# Altium PCB NodeBodyControl.PcbDoc
Units mil, origin at the board's own origin, x right, y up, seen from the top; angles counter-clockwise.
Board outline 7085 x 4100 mil, 2 copper layers (Top Layer, Bottom Layer); 76 components, 25 nets, 290 pads, 0 vias.
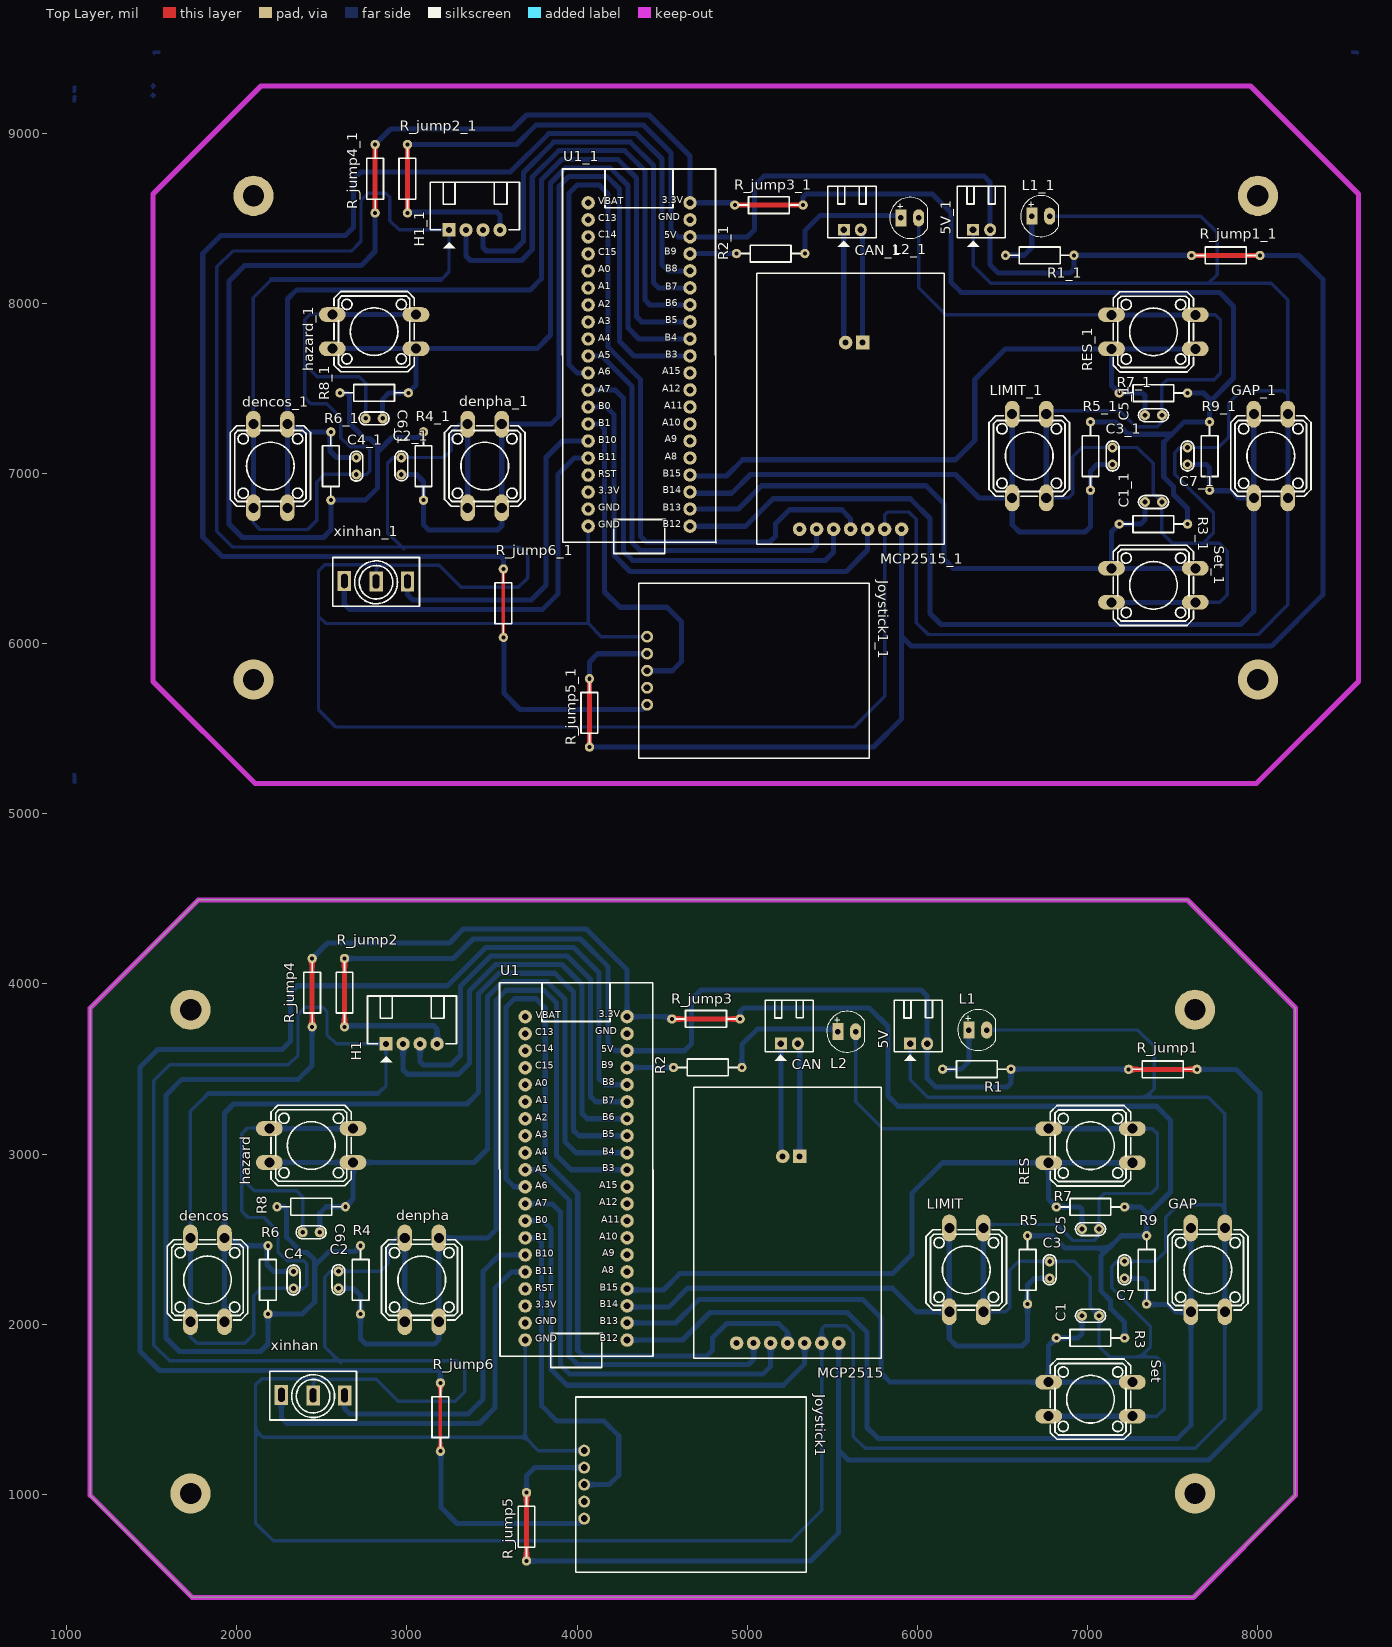
[diagram p0: Top Layer view]
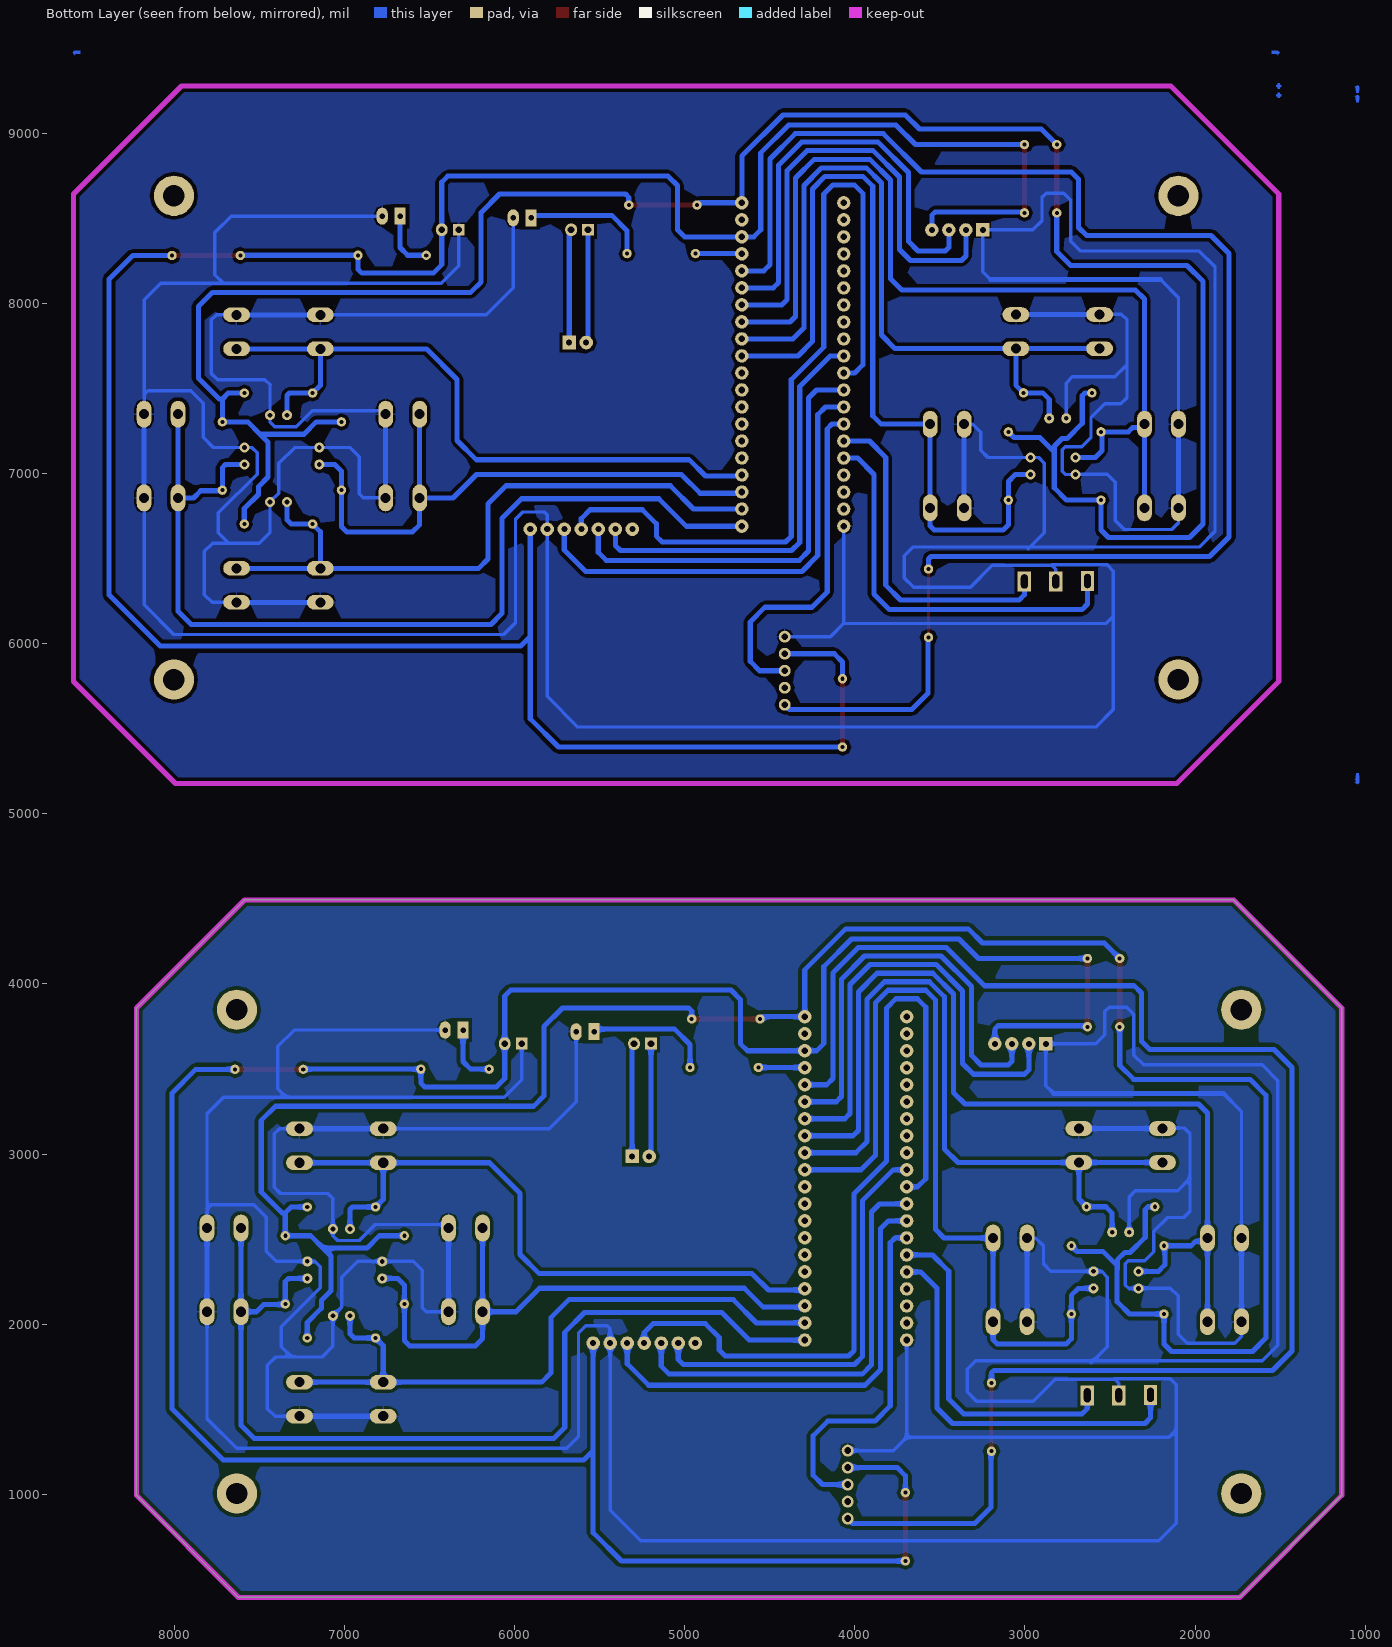
[diagram p1: Bottom Layer view, seen from below]

## Layer stack, top to bottom
Top Solder: solder mask 0.4, Solder Resist, Dk 3.5
Top Layer: signal copper 1.4
Dielectric 1: dielectric 12.6, FR-4, Dk 4.8
Bottom Layer: signal copper 1.4
Bottom Solder: solder mask 0.4, Solder Resist, Dk 3.5

## Board outline
1138,994 1738,394 7623,394 8223,994 8223,3859 7588,4494 1773,4494 1138,3859

## Design rules (kind name [scope] priority, off if disabled: settings)
Clearance [All] p1: gap=20
ComponentClearance Allow_Resistor_Under_Joystick [InComponent('Joystick1') vs InComponent('Designator15')] p1: gap=10 collisioncheckmode=3 verticalgap=100000 showdistances=FALSE
ComponentClearance [All] p2: gap=10 collisioncheckmode=3 verticalgap=10 showdistances=FALSE
Height [All] p1: minheight=0 maxheight=3000 prefheight=500
PolygonConnect [All] p1: connectstyle=Relief reliefconductorwidth=10 reliefentries=4 polygonreliefangle="90 Angle" airgapwidth=10
RoutingVias [All] p1: holewidth=28 width=50 viastyle="Through Hole" minholewidth=28 minwidth=50 maxholewidth=28 maxwidth=50
SolderMaskExpansion [All] p1: expansion=4
Width [All] p1: maxlimit=40 minlimit=20 preferedwidth=30
28 further rules are at their usual default settings.

## Classes and differential pairs
component class NodeBodyControl: 5V C1 C2 C3 C4 C5 C6 C7 CAN dencos denpha GAP H1 hazard Joystick1 L1 L2 LIMIT MCP2515 R1 R2 R3 R4 R5 R6 R7 R8 R9 R_jump1 R_jump2 R_jump3 R_jump4 R_jump5 R_jump6 RES Set U1 xinhan

## Components (designator, comment, footprint, x,y, rotation, side; value= is the part's Value field where it differs from the comment)
5V "Header 2P 2.54 Duc Cong" "Header 2P DC 2.54" 5958,3649 r90 top
5V_1 "Header 2P 2.54 Duc Cong" "Header 2P DC 2.54" 6328,8433 r90 top (schematic designator 5V)
C1 "104" "tu gom" 7017.93,2049 r180 top
C1_1 "104" "tu gom" 7387.93,6833 r180 top (schematic designator C1)
C2 "104" "tu gom" 2597.37,2260.31 r270 top
C2_1 "104" "tu gom" 2967.37,7044.31 r270 top (schematic designator C2)
C3 "104" "tu gom" 6778,2318.93 r270 top
C3_1 "104" "tu gom" 7148,7102.93 r270 top (schematic designator C3)
C4 "104" "tu gom" 2333,2260.17 r90 top
C4_1 "104" "tu gom" 2703,7044.17 r90 top (schematic designator C4)
C5 "104" "tu gom" 7017.93,2559 r180 top
C5_1 "104" "tu gom" 7387.93,7343 r180 top (schematic designator C5)
C6 "104" "tu gom" 2437.37,2540.24 r0 top
C6_1 "104" "tu gom" 2807.37,7324.24 r0 top (schematic designator C6)
C7 "104" "tu gom" 7218,2319 r270 top
C7_1 "104" "tu gom" 7588,7103 r270 top (schematic designator C7)
CAN "" "Header 2P DC 2.54" 5198,3649 r90 top
CAN_1 "" "Header 2P DC 2.54" 5568,8433 r90 top (schematic designator CAN)
dencos "PUSH_BUTTON_12X12" PUSH_BUTTON_12X12_YELLOW 1827.37,2260.24 r270 top
dencos_1 "PUSH_BUTTON_12X12" PUSH_BUTTON_12X12_YELLOW 2197.37,7044.24 r270 top (schematic designator dencos)
denpha "PUSH_BUTTON_12X12" PUSH_BUTTON_12X12_YELLOW 3087.37,2260.24 r270 top
denpha_1 "PUSH_BUTTON_12X12" PUSH_BUTTON_12X12_YELLOW 3457.37,7044.24 r270 top (schematic designator denpha)
GAP "PUSH_BUTTON_12X12" PUSH_BUTTON_12X12_YELLOW 7708,2319 r90 top
GAP_1 "PUSH_BUTTON_12X12" PUSH_BUTTON_12X12_YELLOW 8078,7103 r90 top (schematic designator GAP)
H1 "Header 4P 2.54 Duc Cong" "Header 4P DC 2.54" 2878,3649 r90 top
H1_1 "Header 4P 2.54 Duc Cong" "Header 4P DC 2.54" 3248,8433 r90 top (schematic designator H1)
hazard "PUSH_BUTTON_12X12" PUSH_BUTTON_12X12_RED 2437.37,3050.24 r180 top
hazard_1 "PUSH_BUTTON_12X12" PUSH_BUTTON_12X12_RED 2807.37,7834.24 r180 top (schematic designator hazard)
Joystick1 "Joy" Joystick 3972,857 r0 top
Joystick1_1 "Joy" Joystick 4342,5641 r0 top (schematic designator Joystick1)
L1 "LED 5mm" LED-5MM-Green 6308,3729 r0 top
L1_1 "LED 5mm" LED-5MM-Green 6678,8513 r0 top (schematic designator L1)
L2 "LED 5mm" LED-5MM-Green 5538,3719 r0 top
L2_1 "LED 5mm" LED-5MM-Green 5908,8503 r0 top (schematic designator L2)
LIMIT "PUSH_BUTTON_12X12" PUSH_BUTTON_12X12_YELLOW 6288,2319 r90 top
LIMIT_1 "PUSH_BUTTON_12X12" PUSH_BUTTON_12X12_YELLOW 6658,7103 r90 top (schematic designator LIMIT)
MCP2515 "MCP2515" MCP2515_MODULE 5538,1889 r180 top
MCP2515_1 "MCP2515" MCP2515_MODULE 5908,6673 r180 top (schematic designator MCP2515)
R1 "1k" "tro vach 1/4w" 6350,3499 r180 top
R1_1 "1k" "tro vach 1/4w" 6720,8283 r180 top (schematic designator R1)
R2 "1k" "tro vach 1/4w" 4768,3509 r0 top
R2_1 "1k" "tro vach 1/4w" 5138,8293 r0 top (schematic designator R2)
R3 "10k" "tro vach 1/4w" 7018,1919 r0 top
R3_1 "10k" "tro vach 1/4w" 7388,6703 r0 top (schematic designator R3)
R4 "10k" "tro vach 1/4w" 2727.37,2260.24 r90 top
R4_1 "10k" "tro vach 1/4w" 3097.37,7044.24 r90 top (schematic designator R4)
R5 "10k" "tro vach 1/4w" 6648,2319 r90 top
R5_1 "10k" "tro vach 1/4w" 7018,7103 r90 top (schematic designator R5)
R6 "10k" "tro vach 1/4w" 2183,2260.24 r270 top
R6_1 "10k" "tro vach 1/4w" 2553,7044.24 r270 top (schematic designator R6)
R7 "10k" "tro vach 1/4w" 7018,2689 r0 top
R7_1 "10k" "tro vach 1/4w" 7388,7473 r0 top (schematic designator R7)
R8 "10k" "tro vach 1/4w" 2437.37,2690.24 r180 top
R8_1 "10k" "tro vach 1/4w" 2807.37,7474.24 r180 top (schematic designator R8)
R9 "10k" "tro vach 1/4w" 7348,2319 r90 top
R9_1 "10k" "tro vach 1/4w" 7718,7103 r90 top (schematic designator R9)
R_jump1 "0R" "tro vach 1/4w" 7443,3498 r180 top
R_jump1_1 "0R" "tro vach 1/4w" 7813,8282 r180 top (schematic designator R_jump1)
R_jump2 "0R" "tro vach 1/4w" 2633,3949 r90 top
R_jump2_1 "0R" "tro vach 1/4w" 3003,8733 r90 top (schematic designator R_jump2)
R_jump3 "0R" "tro vach 1/4w" 4758,3794 r180 top
R_jump3_1 "0R" "tro vach 1/4w" 5128,8578 r180 top (schematic designator R_jump3)
R_jump4 "0R" "tro vach 1/4w" 2443,3949 r90 top
R_jump4_1 "0R" "tro vach 1/4w" 2813,8733 r90 top (schematic designator R_jump4)
R_jump5 "0R" "tro vach 1/4w" 3703,809 r90 top
R_jump5_1 "0R" "tro vach 1/4w" 4073,5593 r90 top (schematic designator R_jump5)
R_jump6 "0R" "tro vach 1/4w" 3197,1454 r90 top
R_jump6_1 "0R" "tro vach 1/4w" 3567,6238 r90 top (schematic designator R_jump6)
RES "PUSH_BUTTON_12X12" PUSH_BUTTON_12X12_YELLOW 7018,3049 r180 top
RES_1 "PUSH_BUTTON_12X12" PUSH_BUTTON_12X12_YELLOW 7388,7833 r180 top (schematic designator RES)
Set "PUSH_BUTTON_12X12" PUSH_BUTTON_12X12_YELLOW 7018,1559 r0 top
Set_1 "PUSH_BUTTON_12X12" PUSH_BUTTON_12X12_YELLOW 7388,6343 r0 top (schematic designator Set)
U1 "STM32F103C8T6" "Stm32 BluePill" 3986,3084 r0 top
U1_1 "STM32F103C8T6" "Stm32 BluePill" 4356,7868 r0 top (schematic designator U1)
xinhan "" TOGGLE_SWITCH_SPDT 2448,1583 r0 top
xinhan_1 "" TOGGLE_SWITCH_SPDT 2818,6367 r0 top (schematic designator xinhan)

## Footprints (in the part's own frame and the unit in brackets; to place one, negate y for a bottom-side part, rotate by r counter-clockwise, add the part's x,y. Pads: shape width x height; smd on the part's side, far side on the other; paste and mask are expansions set on the pad)
"Header 2P DC 2.54" [mil]
  rect 70x70 hole 39.37 unplated: 1(0,0)
  oval 75x70 hole 39.37 unplated: 2(0,-100)
  silkscreen extent -100,-190 255,93, body extent -50,-190 250,90, height 237
"Header 4P DC 2.54" [mil]
  rect 78.74x78.74 hole 35: 1(-1,0.71)
  round 78.74 hole 35: 2(-1,-99.29) 3(-1,-199.29) 4(-1,-299.28)
  silkscreen extent -110,-414 280,110, body extent 5,-418 278,118, height 290
Joystick [mil]
  round 70 hole 40: 1(70,400) 2(70,300) 3(70,200) 4(70,100) 5(70,0)
  silkscreen extent 20,-315 1375,715, body extent -198,-333 1369,740, height 1214
LED-5MM-Green [mil] "LED 2 PIN, 5 ly , Only colour,pin to pin 100mil"
  rect 65x100 hole 32: 1(-5,0)
  oval 65x100 hole 32: 2(100,0)
  silkscreen extent -70,-120 154,120, body extent -69,-120 145,117, height 339
MCP2515_MODULE [mil]
  round 80 hole 35.43: 1(600,0) 2(500,0) 3(400,0) 4(300,0) 5(200,0) 6(100,0) 7(0,0) 9(329.13,-1097.28)
  rect 80x80 hole 35.43: 8(229.13,-1097.28)
  silkscreen extent -251,-1504 851,89, body extent -251,-1496 851,79, height 444
PUSH_BUTTON_12X12_RED [mm]
  oval 4x2.2 hole 1.5: 1(-6.251,2.54) 1(6.251,2.54) 2(-6.251,-2.54) 2(6.251,-2.54)
  silkscreen extent -5.99,-6 5.99,6, body extent -6.77,-6.01 6.65,6, height 8.84
PUSH_BUTTON_12X12_YELLOW [mm]
  oval 4x2.2 hole 1.5: 1(-6.251,2.54) 1(6.251,2.54) 2(-6.251,-2.54) 2(6.251,-2.54)
  silkscreen extent -5.99,-6 5.99,6, body extent -6.77,-6.01 6.65,6, height 8.84
"Stm32 BluePill" [mm]
  round 2 hole 1: 1(7.828,-29.909) 2(7.828,-27.343) 3(7.828,-24.803) 4(7.828,-22.263) 5(7.828,-19.723) 6(7.828,-17.183) 7(7.828,-14.643) 8(7.828,-12.103) 9(7.828,-9.563) 10(7.828,-7.023) 11(7.828,-4.483) 12(7.828,-1.943) 13(7.828,0.597) 14(7.828,3.137) 15(7.828,5.677) 16(7.828,8.217) 17(7.828,10.757) 18(7.828,13.297) 19(7.828,15.837) 20(7.828,18.377) 21(-7.386,18.366) 22(-7.386,15.826) 23(-7.386,13.286) 24(-7.386,10.746) 25(-7.386,8.206) 26(-7.386,5.666) 27(-7.386,3.126) 28(-7.386,0.586) 29(-7.386,-1.954) 30(-7.386,-4.494) 31(-7.386,-7.034) 32(-7.386,-9.574) 33(-7.386,-12.114) 34(-7.386,-14.654) 35(-7.386,-17.194) 36(-7.386,-19.734) 37(-7.386,-22.274) 38(-7.386,-24.814) 39(-7.386,-27.354) 40(-7.386,-29.894)
  silkscreen extent -11.22,-34 11.69,23.43, body extent -11.18,-33.27 11.68,24.29, height 12.31
TOGGLE_SWITCH_SPDT [mm]
  rect 2x3 hole 1 slot 2.1 at 90 deg: 1(-4.715,0.031) 2(0.016,-0.031) 3(4.715,-0.031)
  silkscreen extent -6.46,-3.71 6.49,3.56, body extent -6.49,-6.02 6.52,5.96, height 30.32
"tro vach 1/4w" [mm]
  round 1.4 hole 0.6: 1(-5.1,0) 2(5.1,0)
  silkscreen extent -4.39,-1.25 4.42,1.25, body extent -5.38,-1.2 5.38,1.2, height 2.41
"tu gom" [mm] "Tu gom mini"
  round 1.5 hole 0.7: 1(-1.27,0) 2(1.27,0)
  silkscreen extent -2.25,-0.97 2.22,0.97, body extent -2.92,-0.85 2.92,0.85, height 6.12

## Part data
5V 5V_1 H1 H1_1: "Cắm"
C1 C1_1 C2 C2_1 C3 C3_1 C4 C4_1 C5 C5_1 C6 C6_1 C7 C7_1: library part "Tu gom 104 50V", "Cắm"
CAN CAN_1: library part "Header 2P 2.54 Duc Cong", "Cắm"
dencos dencos_1 denpha denpha_1 GAP GAP_1 hazard hazard_1 LIMIT LIMIT_1 RES RES_1 Set Set_1: "Push Button Tactile Switch PTH 4 Pins 12x12mm."
L1 L1_1 L2 L2_1: library part "LED 5mm Xanh La", "Cắm"
R1 R1_1 R2 R2_1: library part "Tro Vach 1/4W 5% 1k", "Cắm"
R3 R3_1 R4 R4_1 R5 R5_1 R6 R6_1 R7 R7_1 R8 R8_1 R9 R9_1: library part "Tro Vach 1/4W 5% 10k", "Căm"
R_jump1 R_jump1_1 R_jump2 R_jump2_1 R_jump3 R_jump3_1 R_jump4 R_jump4_1 R_jump5 R_jump5_1 R_jump6 R_jump6_1: library part "Tro Vach 1/4W 5% 0.11R", "Cắm"
U1 U1_1: library part BluePill, "Designed By @Alixahedi"
xinhan xinhan_1: library part TOGGLE_SWITCH_SPDT, "Toggle Switch SPDT, 125V AC, 6A, 33x13x7mm."

## Free pads (board coordinates)
  round 236.22 hole 125.98: 2(1728.39,1004.67) 2(1728.39,3848.45) 2(2098.39,5788.67) 2(2098.39,8632.45) 2(7632.29,1004.67) 2(7632.29,3848.45) 2(8002.29,5788.67) 2(8002.29,8632.45)

## Nets (pads, with @x,y where several pads share a name; then routed paths per layer and width w, separated by ;. In a path a pad name is that pad's centre, name@x,y a point inside that pad or via, vN(x,y) a via of type N, cw(c..) or ccw(c..) an arc to the next point about the centre after c; other vN are vias at no path point)
3V3: R3.2 R4.2 R5.2 R6.2 R7.2 R8.2 R9.2 R_jump3.1 R_jump3.2 R_jump4.1 R_jump4.2 U1.20 | length 13472.5
  Top Layer w30: R_jump4.1 R_jump4.2 ; R_jump3.2 R_jump3.1
  Bottom Layer w20: 2458,2343 2458,2351 ; 2528,4234.79 2534.21,4241
  Bottom Layer w30: R6.2 2183,1884 2139,1840 1663,1840 1584,1919 1584,3346 1677,3439 2361,3439 2443,3521 R_jump4.1 ; R6.2@2187.37,2059.45 2385.45,2059.45 2458,2132 2458,2343 2543,2428 2694.34,2428 R4.2 ; R8.2 2276.76,2690.24 2293,2674 2293,2511 2382,2422 2413,2422 2457,2378 2457,2323 ; R_jump4.2 2528,4234.79 ; 2534.21,4241 3250,4241 3333,4324 4053,4324 4294.2,4082.8 U1.20 4543.71,3807.5 R_jump3.2 ; R_jump3.1 4958.79,3839.79 4978,3859 5718,3859 5828,3749 5828,3341 5888,3281 7406,3281 7489,3198 7489,2777 7366.5,2654.5 7347.5,2654.5 7313,2689 R7.2 ; R5.2 6795.21,2519.79 6868,2447 7126,2447 ; R3.2 7218.79,2010.21 7136,2093 7136,2139 7079,2196 7079,2400 7126,2447 ; 7348,2654 R9.2 7198.79,2519.79 7126,2447
5V: 5V.2 H1.4 Joystick1.2 MCP2515.7 R1.1 R_jump1.1 R_jump1.2 R_jump2.1 R_jump2.2 R_jump5.1 R_jump5.2 U1.18 | length 16346.5
  Top Layer w30: R_jump2.1 R_jump2.2 ; R_jump5.1 R_jump5.2 ; R_jump1.2 R_jump1.1
  Bottom Layer w30: R_jump2.1 2638.79,3754 3158,3754 3177.28,3734.72 H1.4 ; R_jump2.2 3273.79,4149.79 3388,4264 4020,4264 4183,4101 4183,3649 4224.5,3607.5 U1.18 4631.5,3607.5 4673,3649 4673,3909 4728,3964 6023,3964 6058,3929 5V.2 6058,3444 6108,3394 6528,3394 6550.79,3416.79 R1.1 7241.21,3499 R_jump1.2 ; R_jump5.2@3695.2,1017.59 R_jump5.2 3703,1109 3751,1157 Joystick1.2 ; R_jump5.1 5372.21,608.21 5538,774 5538,1258 ; MCP2515.7 5538,1258 ; R_jump1.1 7874,3498 8014,3358 8014,1503 7713,1202 5594,1202 5538,1258
CRUISE_CONTROL: Joystick1.5 R_jump6.1 R_jump6.2 U1.16 | length 9189.2
  Top Layer w20: R_jump6.1 R_jump6.2
  Bottom Layer w30: R_jump6.2 3197,1714 3183,1728 1545,1728 1430,1843 1430,3509 1536,3615 2267,3615 2315,3663 2315,3946 2358,3989 3238,3989 3463,4214 3980,4214 4129,4065 4129,3444 4165.5,3407.5 U1.16 ; R_jump6.1@3200,1253.21 3200,924 3295,829 4014,829 Joystick1.5
CS_CAN: MCP2515.5 U1.33 | length 2702.2
  Bottom Layer w30: U1.33 3802.93,2607.07 3848,2562 3848,1734 3941,1641 5212,1641 5338,1767 MCP2515.5
DENCOS: C4.2 dencos.1 R6.1 U1.13 | length 5706.4
  Bottom Layer w20: dencos.1@1927.37,2506.34 dencos.1@1946.71,2487
  Bottom Layer w30: dencos.1@1927.37,2014.14 1927.37,2506.34 1927.37,3241.37 1980,3294 3353,3294 3420,3361 3420,3941.13 3541.87,4063 3869,4063 3979,3953 3979,3139 4010.5,3107.5 U1.13 ; dencos.1@1946.71,2487 1997,2487 2022.97,2461.03 R6.1 2178,2456.03 2178,2349 2216.83,2310.17 C4.2
DENPHA: C2.2 denpha.1 R4.1 U1.11 | length 4944.8
  Bottom Layer w30: C2.2 2686.69,2210.31 2727.37,2169.63 R4.1 2727.37,1914.63 2758,1884 3163,1884 3187.37,1908.37 3187.37,2014.14 3187.37,2506.34 3475.34,2506.34 3525,2556 3525,3904.71 3583.29,3963 3804.71,3963 3879,3888.71 3879,2993 3964.5,2907.5 U1.11
ECHO: H1.2 U1.14 | length 2817
  Bottom Layer w30: H1.2 2977.29,3494.71 3003,3469 3303,3469 3367,3533 3367,3958.84 3522.16,4114 3911,4114 4029,3996 4029,3238 4059.5,3207.5 U1.14
GAP: C7.2 GAP.1 R9.1 U1.1 | length 5753.7
  Bottom Layer w30: U1.1 4620.5,1906.5 4782,2068 5589,2068 5705,1952 5705,1393 5769,1329 7531,1329 7608,1406 GAP.1@7608,2072.9 ; C7.2 7329,2269 7348,2250 R9.1 7351.21,2115 7475,2115 7517.1,2072.9 GAP.1@7608,2072.9 ; GAP.1@7608,2565.1 GAP.1@7608,2072.9
GND: 5V.1 C1.1 C2.1 C3.1 C4.1 C5.1 C6.1 C7.1 dencos.2 denpha.2 GAP.2 H1.1 hazard.2 Joystick1.1 L1.2 L2.2 LIMIT.2 MCP2515.6 RES.2 Set.2 U1.40 xinhan.2 | length 39707.5
  Bottom Layer w20: dencos.2@1727.37,2014.14 1727.37,1925.63 1766,1887 2046,1887 2099,1940 2099,2166 2145,2212 2331.17,2212 C4.1 2391.17,2210.17 2411,2230 2411,2355 2393,2373 2296,2373 2242,2427 2242,2545 2160,2627 2066,2627 2030,2663 2030,2857 ; dencos.2@1727.37,2506.34 1727.37,3250.37 1833,3356 ; hazard.2@2191.27,3150.24 2188.51,3153 2063,3153 2030,3120 2030,2857 ; C6.1 2387.37,2747.63 2351,2784 2103,2784 2030,2857 ; xinhan.2 2448.63,1653.63 2474,1679 2146,1679 2110,1643 2110,1378 ; 2471,1676 2821,1676 2950,1547 3285,1547 3340,1602 3340,1734 3290,1784 1606,1784 1513,1877 1513,3432 1605,3524 2302,3524 2360,3582 2360,3822 2402,3864 2505,3864 2530,3839 2530,3702 2584,3648 H1.1 2877.29,3402.29 2831,3356 ; 2611,1773 2516,1868 2516,2277 2549.31,2310.31 C2.1 2847.31,2310.31 2891,2354 2891,2460 2937.34,2506.34 denpha.2@2987.37,2506.34 ; U1.40 3695.2,1334.8 ; Joystick1.1 3773,1257 3695.2,1334.8 ; L2.2 5638,3307 5796,3149 RES.2@6771.9,3149 ; 5V.1 5958,3438 6062,3334 7341,3334 ; LIMIT.2@6388,2072.9 6519.9,2072.9 6543,2096 6543,2316 6595.93,2368.93 C3.1 6923.07,2368.93 7016,2276 7016,2100.93 C1.1 7067.93,1869.07 7130,1807 7311,1807 ; LIMIT.2@6388,2565.1 6408.9,2586 6819,2586 6913,2492 7040,2492 7067.93,2519.93 C5.1 7067.93,2736.07 7067,2737 7098,2768 7376,2768 7412,2804 7412,3119 7382,3149 RES.2@7264.1,3149 ; L1.2 7296,3729 7392,3633 7392,3385 7341,3334 ; Set.2@7264.1,1459 7408,1459 7453,1504 7453,1758 7404,1807 7311,1807 ; GAP.2@7808,2072.9 7808,1444 7634,1270 5694,1270 5624.5,1339.5 5624.5,1946.5 5581,1990 5456,1990 5439,1973 5439,1890 MCP2515.6 5438,906 5258,726 2213,726 2110,829 2110,1378 ; GAP.2@7808,2565.1 7808,2679 ; 2110,1378 2153.2,1334.8 3695.2,1334.8 ; 7311,1807 7371,1867 7371,1985 7143,2213 7143,2338 7174,2369 C7.1 7400,2369 7460,2429 7460,2628 7534,2702 7785,2702 7808,2679 ; 7341,3334 7711,3334 7808,3237 7808,2679
  Bottom Layer w30: dencos.2@1727.37,2014.14 dencos.2@1727.37,2506.34 ; 1833,3356 2831,3356 ; hazard.2@2191.27,3150.24 hazard.2@2683.47,3150.24 ; denpha.2@2987.37,2014.14 denpha.2@2987.37,2506.34 ; LIMIT.2@6388,2072.9 LIMIT.2@6388,2565.1 ; Set.2@6771.9,1459 Set.2@7264.1,1459 ; RES.2@6771.9,3149 RES.2@7264.1,3149 ; GAP.2@7808,2072.9 GAP.2@7808,2565.1
H: CAN.1 MCP2515.9 | length 667.2
  Bottom Layer w30: CAN.1 5198,2997.15 MCP2515.9
HAZARD: C6.2 hazard.1 R8.1 U1.12 | length 4530.9
  Bottom Layer w30: hazard.1@2191.27,2950.24 hazard.1@2683.47,2950.24 ; C6.2 2487.37,2652.37 2525.24,2690.24 R8.1 2683.47,2735.55 hazard.1@2683.47,2950.24 ; U1.12 3994.5,3007.5 3929,3073 3929,3909.42 3825.42,4013 3562.58,4013 3474,3924.42 3474,3030 3394.24,2950.24 hazard.1@2683.47,2950.24
L: CAN.2 MCP2515.8 | length 667.2
  Bottom Layer w30: CAN.2 5308.87,3638.13 MCP2515.8
LED_CAN: R2.1 U1.17 | length 273.6
  Bottom Layer w30: U1.17 4295.7,3509 R2.1
LIMIT: C3.2 LIMIT.1 R5.1 U1.3 | length 3613.4
  Bottom Layer w30: U1.3 4301.7,2100 4539,2100 4650,2211 5854,2211 5992.1,2072.9 LIMIT.1@6188,2072.9 ; LIMIT.1@6188,2565.1 LIMIT.1@6188,2072.9 ; C3.2 6686.93,2268.93 6648,2230 R5.1 6648,1904 6616,1872 6231,1872 6188,1915 LIMIT.1@6188,2072.9
MISO: MCP2515.4 U1.31 | length 4957.9
  Bottom Layer w30: U1.31 3630.93,2807.07 3583,2855 3583,3863 3633,3913 3759,3913 3813,3859 3813,2959 4004,2768 4004,1846 4037,1813 4762,1813 4797,1848 4797,1921 4879,2003 5186,2003 5238,1951 MCP2515.4
MOSI: MCP2515.3 U1.32 | length 2539.5
  Bottom Layer w30: U1.32 3854.93,2707.07 3902,2660 3902,1761 3957,1706 5091,1706 5138,1753 MCP2515.3
NetL1_1: L1.1 R1.2 | length 357.4
  Bottom Layer w30: R1.2 6258,3499 6303,3544 L1.1
NetL2_1: L2.1 R2.2 | length 742.6
  Bottom Layer w30: R2.2 4968.79,3643.79 5059,3734 5518,3734 L2.1
RES: C5.2 R7.1 RES.1 U1.4 | length 4043.5
  Bottom Layer w30: U1.4 4300.7,2201 4508,2201 4604,2297 5855,2297 5968,2410 5968,2769 6148,2949 RES.1@6771.9,2949 ; C5.2 6967.93,2674.07 6953,2689 R7.1 6771.9,2734.31 RES.1@6771.9,2949 ; RES.1@7264.1,2949 RES.1@6771.9,2949
SCK: MCP2515.2 U1.30 | length 2462.3
  Bottom Layer w30: U1.30 3774.93,2907.07 3954,2728 3954,1811 4002,1763 5008,1763 5038,1793 MCP2515.2
SET: C1.2 R3.1 Set.1 U1.2 | length 3962.6
  Bottom Layer w30: U1.2 4578.5,2007.5 4715,2144 5681,2144 5787,2038 5787,1713 5841,1659 Set.1@6771.9,1659 ; C1.2 6967.93,1943.93 6943,1919 R3.1 6771.9,1873.69 Set.1@6771.9,1659 ; Set.1@7264.1,1659 Set.1@6771.9,1659
SPEED: Joystick1.3 U1.34 | length 2051.1
  Bottom Layer w30: U1.34 3763.93,2507.07 3792,2479 3792,1520 3882,1430 4159,1430 4245,1344 4245,1112 4190,1057 Joystick1.3
TRIG: H1.3 U1.15 | length 2590.1
  Bottom Layer w30: H1.3 3077.29,3544.71 3098,3524 3258,3524 3315,3581 3315,3986 3493,4164 3943,4164 4079,4028 4079,3338 4109.5,3307.5 U1.15
XNP: U1.36 xinhan.1 | length 2363.7
  Bottom Layer w30: xinhan.1@2261.74,1584.24 2261.74,1449.26 2295,1416 3426,1416 3517,1507 3517,2211 3613.07,2307.07 U1.36
XNT: U1.35 xinhan.3 | length 1979.4
  Bottom Layer w30: xinhan.3 2633.63,1503.37 2664,1473 3361,1473 3448,1560 3448,2311 3544.07,2407.07 U1.35
pads on no net: 5V_1.1 5V_1.2 C1_1.1 C1_1.2 C2_1.1 C2_1.2 C3_1.1 C3_1.2 C4_1.1 C4_1.2 C5_1.1 C5_1.2 C6_1.1 C6_1.2 C7_1.1 C7_1.2 CAN_1.1 CAN_1.2 dencos_1.1 dencos_1.2 denpha_1.1 denpha_1.2 GAP_1.1 GAP_1.2 H1_1.1 H1_1.2 H1_1.3 H1_1.4 hazard_1.1 hazard_1.2 Joystick1.4 Joystick1_1.1 Joystick1_1.2 Joystick1_1.3 Joystick1_1.4 Joystick1_1.5 L1_1.1 L1_1.2 L2_1.1 L2_1.2 LIMIT_1.1 LIMIT_1.2 MCP2515.1 MCP2515_1.1 MCP2515_1.2 MCP2515_1.3 MCP2515_1.4 MCP2515_1.5 MCP2515_1.6 MCP2515_1.7 MCP2515_1.8 MCP2515_1.9 R1_1.1 R1_1.2 R2_1.1 R2_1.2 R3_1.1 R3_1.2 R4_1.1 R4_1.2 R5_1.1 R5_1.2 R6_1.1 R6_1.2 R7_1.1 R7_1.2 R8_1.1 R8_1.2 R9_1.1 R9_1.2 R_jump1_1.1 R_jump1_1.2 R_jump2_1.1 R_jump2_1.2 R_jump3_1.1 R_jump3_1.2 R_jump4_1.1 R_jump4_1.2 R_jump5_1.1 R_jump5_1.2 R_jump6_1.1 R_jump6_1.2 RES_1.1 RES_1.2 Set_1.1 Set_1.2 U1.5 U1.6 U1.7 U1.8 U1.9 U1.10 U1.19 U1.21 U1.22 U1.23 U1.24 U1.25 U1.26 U1.27 U1.28 U1.29 U1.37 U1.38 U1.39 U1_1.1 U1_1.2 U1_1.3 U1_1.4 U1_1.5 U1_1.6 U1_1.7 U1_1.8 U1_1.9 U1_1.10 U1_1.11 U1_1.12 U1_1.13 U1_1.14 U1_1.15 U1_1.16 U1_1.17 U1_1.18 U1_1.19 U1_1.20 U1_1.21 U1_1.22 U1_1.23 U1_1.24 U1_1.25 U1_1.26 U1_1.27 U1_1.28 U1_1.29 U1_1.30 U1_1.31 U1_1.32 U1_1.33 U1_1.34 U1_1.35 U1_1.36 U1_1.37 U1_1.38 U1_1.39 U1_1.40 xinhan_1.1 xinhan_1.2 xinhan_1.3
copper on no net: | length 138442.1
  Top Layer w20: 3567,6037.21 3567,6438.79
  Top Layer w30: 2813,8532.21 2813,8933.79 ; 3003,8532.21 3003,8933.79 ; 4073,5392.21 4073,5793.79 ; 4927.21,8578 5328.79,8578 ; 7612.21,8282 8013.79,8282
  Bottom Layer w20: 2097.37,6798.14 2097.37,6709.63 2136,6671 2416,6671 2469,6724 2469,6950 2515,6996 2701.17,6996 2703,6994.17 2761.17,6994.17 2781,7014 2781,7139 2763,7157 2666,7157 2612,7211 2612,7329 2530,7411 2436,7411 2400,7447 2400,7641 ; 2097.37,7290.34 2097.37,8034.37 2203,8140 ; 2297.37,7290.34 2316.71,7271 ; 2561.27,7934.24 2558.51,7937 2433,7937 2400,7904 2400,7641 ; 2757.37,7324.24 2757.37,7531.63 2721,7568 2473,7568 2400,7641 ; 2818.63,6365.76 2818.63,6437.63 2844,6463 2516,6463 2480,6427 2480,6162 ; 2828,7127 2828,7135 ; 2841,6460 3191,6460 3320,6331 3655,6331 3710,6386 3710,6518 3660,6568 1976,6568 1883,6661 1883,8216 1975,8308 2672,8308 2730,8366 2730,8606 2772,8648 2875,8648 2900,8623 2900,8486 2954,8432 3247.29,8432 3247.29,8186.29 3201,8140 ; 2898,9018.79 2904.21,9025 ; 2981,6557 2886,6652 2886,7061 2919.31,7094.31 2967.37,7094.31 3217.31,7094.31 3261,7138 3261,7244 3307.34,7290.34 3357.37,7290.34 ; 4065.2,6691.07 4065.2,6118.8 ; 4412,6041 4143,6041 4065.2,6118.8 ; 6008,8503 6008,8091 6166,7933 7141.9,7933 ; 6328,8433 6328,8222 6432,8118 7711,8118 ; 6758,6856.9 6889.9,6856.9 6913,6880 6913,7100 6965.93,7152.93 7148,7152.93 7293.07,7152.93 7386,7060 7386,6884.93 7437.93,6833 7437.93,6653.07 7500,6591 7681,6591 ; 6758,7349.1 6778.9,7370 7189,7370 7283,7276 7410,7276 7437.93,7303.93 7437.93,7343 7437.93,7520.07 7437,7521 7468,7552 7746,7552 7782,7588 7782,7903 7752,7933 7634.1,7933 ; 6778,8513 7666,8513 7762,8417 7762,8169 7711,8118 ; 7634.1,6243 7778,6243 7823,6288 7823,6542 7774,6591 7681,6591 ; 8178,6856.9 8178,6228 8004,6054 6064,6054 5994.5,6123.5 5994.5,6730.5 5951,6774 5826,6774 5809,6757 5809,6674 5808,6673 5808,5690 5628,5510 2583,5510 2480,5613 2480,6162 ; 8178,7349.1 8178,7463 ; 2480,6162 2523.2,6118.8 4065.2,6118.8 ; 7681,6591 7741,6651 7741,6769 7513,6997 7513,7122 7544,7153 7588,7153 7770,7153 7830,7213 7830,7412 7904,7486 8155,7486 8178,7463 ; 7711,8118 8081,8118 8178,8021 8178,7463
  Bottom Layer w30: 2097.37,6798.14 2097.37,7290.34 ; 2203,8140 3201,8140 ; 2297.37,6798.14 2297.37,7290.34 2297.37,8025.37 2350,8078 3723,8078 3790,8145 3790,8725.13 3911.87,8847 4239,8847 4349,8737 4349,7923 4380.5,7891.5 4664.2,7891.5 ; 2316.71,7271 2367,7271 2392.97,7245.03 2553,7245.03 2548,7240.03 2548,7133 2586.83,7094.17 2703,7094.17 ; 2553,6843.45 2553,6668 2509,6624 2033,6624 1954,6703 1954,8130 2047,8223 2731,8223 2813,8305 2813,8532.21 ; 2557.37,6843.45 2755.45,6843.45 2828,6916 2828,7127 2913,7212 3064.34,7212 3097.37,7245.03 ; 2561.27,7734.24 3053.47,7734.24 ; 2561.27,7934.24 3053.47,7934.24 ; 2606.58,7474.24 2646.76,7474.24 2663,7458 2663,7295 2752,7206 2783,7206 2827,7162 2827,7107 ; 2631.74,6368.24 2631.74,6233.26 2665,6200 3796,6200 3887,6291 3887,6995 3983.07,7091.07 4065.2,7091.07 ; 2813,8933.79 2898,9018.79 ; 2857.37,7324.24 2857.37,7436.37 2895.24,7474.24 3008.16,7474.24 3053.47,7519.55 3053.47,7734.24 ; 2904.21,9025 3620,9025 3703,9108 4423,9108 4664.2,8866.8 4664.2,8591.5 4913.71,8591.5 4927.21,8578 ; 2967.37,6994.31 3056.69,6994.31 3097.37,6953.63 3097.37,6843.45 3097.37,6698.63 3128,6668 3533,6668 3557.37,6692.37 3557.37,6798.14 3557.37,7290.34 3845.34,7290.34 3895,7340 3895,8688.71 3953.29,8747 4174.71,8747 4249,8672.71 4249,7777 4334.5,7691.5 4664.2,7691.5 ; 3003,8532.21 3008.79,8538 3528,8538 3547.28,8518.72 3547.28,8432 ; 3003,8933.79 3643.79,8933.79 3758,9048 4390,9048 4553,8885 4553,8433 4594.5,8391.5 4664.2,8391.5 5001.5,8391.5 5043,8433 5043,8693 5098,8748 6393,8748 6428,8713 6428,8433 6428,8228 6478,8178 6898,8178 6920.79,8200.79 6920.79,8283 7611.21,8283 7612.21,8282 ; 3003.63,6365.76 3003.63,6287.37 3034,6257 3731,6257 3818,6344 3818,7095 3914.07,7191.07 4065.2,7191.07 ; 3347.29,8432 3347.29,8278.71 3373,8253 3673,8253 3737,8317 3737,8742.84 3892.16,8898 4281,8898 4399,8780 4399,8022 4429.5,7991.5 4664.2,7991.5 ; 3357.37,6798.14 3357.37,7290.34 ; 3447.29,8432 3447.29,8328.71 3468,8308 3628,8308 3685,8365 3685,8770 3863,8948 4313,8948 4449,8812 4449,8122 4479.5,8091.5 4664.2,8091.5 ; 3567,6438.79 3567,6498 3553,6512 1915,6512 1800,6627 1800,8293 1906,8399 2637,8399 2685,8447 2685,8730 2728,8773 3608,8773 3833,8998 4350,8998 4499,8849 4499,8228 4535.5,8191.5 4664.2,8191.5 ; 3570,6037.21 3570,5708 3665,5613 4384,5613 4412,5641 ; 4065.2,5801.59 4073,5793.79 4073,5893 4121,5941 4412,5941 ; 4065.2,7291.07 4133.93,7291.07 4162,7263 4162,6304 4252,6214 4529,6214 4615,6128 4615,5896 4560,5841 4412,5841 ; 4065.2,7391.07 4172.93,7391.07 4218,7346 4218,6518 4311,6425 5582,6425 5708,6551 5708,6673 ; 4065.2,7491.07 4224.93,7491.07 4272,7444 4272,6545 4327,6490 5461,6490 5508,6537 5508,6673 ; 4065.2,7591.07 4000.93,7591.07 3953,7639 3953,8647 4003,8697 4129,8697 4183,8643 4183,7743 4374,7552 4374,6630 4407,6597 5132,6597 5167,6632 5167,6705 5249,6787 5556,6787 5608,6735 5608,6673 ; 4065.2,7691.07 4144.93,7691.07 4324,7512 4324,6595 4372,6547 5378,6547 5408,6577 5408,6673 ; 4073,5392.21 5742.21,5392.21 5908,5558 5908,6042 ; 4664.2,6690.5 4990.5,6690.5 5152,6852 5959,6852 6075,6736 6075,6177 6139,6113 7901,6113 7978,6190 7978,6856.9 ; 4664.2,6791.5 4948.5,6791.5 5085,6928 6051,6928 6157,6822 6157,6497 6211,6443 7141.9,6443 ; 4664.2,6891.5 4671.7,6884 4909,6884 5020,6995 6224,6995 6362.1,6856.9 6558,6856.9 ; 4664.2,6991.5 4670.7,6985 4878,6985 4974,7081 6225,7081 6338,7194 6338,7553 6518,7733 7141.9,7733 ; 4664.2,7791.5 4364.5,7791.5 4299,7857 4299,8693.42 4195.42,8797 3932.58,8797 3844,8708.42 3844,7814 3764.24,7734.24 3053.47,7734.24 ; 4664.2,8291.5 4665.7,8293 4937.21,8293 ; 5328.79,8578 5328.79,8623.79 5348,8643 6088,8643 6198,8533 6198,8125 6258,8065 7776,8065 7859,7982 7859,7561 7736.5,7438.5 7717.5,7438.5 7683,7473 7588.79,7473 ; 5338.79,8293 5338.79,8427.79 5429,8518 5888,8518 5903,8503 ; 5568,8433 5568,7781.15 5578.87,7770.28 ; 5668,8433 5678.87,8422.13 5678.87,7770.28 ; 5908,6673 5908,6042 ; 6519.21,8283 6628,8283 6673,8328 6673,8513 ; 6558,7349.1 6558,6856.9 ; 6758,6856.9 6758,7349.1 ; 7018,7303.79 7165.21,7303.79 7238,7231 7496,7231 ; 7141.9,6243 7634.1,6243 ; 7141.9,7933 7634.1,7933 ; 7148,7052.93 7056.93,7052.93 7018,7014 7018,6902.21 7018,6688 6986,6656 6601,6656 6558,6699 6558,6856.9 ; 7337.93,6833 7337.93,6727.93 7313,6703 7187.21,6703 7141.9,6657.69 7141.9,6443 ; 7337.93,7343 7337.93,7458.07 7323,7473 7187.21,7473 7141.9,7518.31 7141.9,7733 ; 7588,7053 7699,7053 7718,7034 7718,6902.21 7721.21,6899 7845,6899 7887.1,6856.9 7978,6856.9 ; 7588.79,6703 7588.79,6794.21 7506,6877 7506,6923 7449,6980 7449,7184 7496,7231 ; 7634.1,6443 7141.9,6443 ; 7634.1,7733 7141.9,7733 ; 7718,7438 7718,7303.79 7568.79,7303.79 7496,7231 ; 7978,7349.1 7978,6856.9 ; 8013.79,8282 8244,8282 8384,8142 8384,6287 8083,5986 5964,5986 5908,6042 ; 8178,6856.9 8178,7349.1

## Polygon pours and split planes (outlines as drawn)
no net on Bottom Layer "Bottom Layer-No Net" (solid, remove dead copper, pour order 22): 2143,9278 7958,9278 8591,8645 8593,8643 8593,5778 7993,5178 2108,5178 1508,5778 1508,8643
GND on Bottom Layer "Bottom Layer-No Net" (solid, remove dead copper, pour order 20): 1773,4494 7588,4494 8221,3861 8223,3859 8223,994 7623,394 1738,394 1138,994 1138,3859

## Keep-outs
Keep-Out Layer:
  lines w30: 1138,994 1738,394 7623,394 8223,994 8223,3859 7588,4494 1773,4494 1138,3859 1138,994 ; 1508,5778 1508,8643 2143,9278 7958,9278 8593,8643 8593,5778 7993,5178 2108,5178 1508,5778

## Dimensions
2143,9278 to 2108,5178 on Top Layer
1508,8643 to 8593,8643 on Top Layer

## Text inside footprints (layer, text, board x,y; h text height)
U1: Top Overlay "5V" at 4143.2,3583.78 h70; Top Overlay "B9" at 4143.2,3488.78 h70; Top Overlay "B8" at 4148.2,3388.78 h70; Top Overlay "3.3V" at 4128.2,3788.78 h70; Top Overlay "GND" at 4106,3689.78 h70; Top Overlay "A5" at 3753.2,2878.78 h70; Top Overlay "A2" at 3753.2,3180 h70; Top Overlay "A3" at 3753.2,3079.78 h70; Top Overlay "A4" at 3753.2,2978 h70; Top Overlay "RST" at 3753.2,2178.78 h70; Top Overlay "B10" at 3753.2,2380.78 h70; Top Overlay "B11" at 3753.2,2279 h70; Top Overlay "A6" at 3753.2,2780.78 h70; Top Overlay "A7" at 3753.2,2679 h70; Top Overlay "B0" at 3753.2,2578.78 h70; Top Overlay "B1" at 3753.2,2478 h70; Top Overlay "3.3V" at 3753.2,2081.78 h70; Top Overlay "B15" at 4133.6,2182.78 h70; Top Overlay "A8" at 4145.7,2283.78 h70; Top Overlay "A11" at 4142.4,2582 h70; Top Overlay "B3" at 4148.2,2882.78 h70; Top Overlay "A9" at 4146.9,2384.78 h70; Top Overlay "A15" at 4131.1,2784.78 h70; Top Overlay "A12" at 4131.1,2683 h70; Top Overlay "A10" at 4131.1,2482.78 h70; Top Overlay "VBAT" at 3756.06,3784 h70; Top Overlay "B5" at 4148.2,3083.78 h70; Top Overlay "B14" at 4132.4,2085 h70; Top Overlay "B7" at 4148.2,3282 h70; Top Overlay "B4" at 4146.9,2982 h70; Top Overlay "B6" at 4149.4,3184.78 h70; Top Overlay "C15" at 3753.2,3485.78 h70; Top Overlay "C13" at 3753.2,3684.78 h70; Top Overlay "C14" at 3753.2,3586.78 h70; Top Overlay "A0" at 3753.2,3384.78 h70; Top Overlay "A1" at 3756,3284 h70; Top Overlay "GND" at 3753.2,1983.78 h70; Top Overlay "B13" at 4133.2,1983.78 h70; Top Overlay "GND" at 3753.2,1882.78 h70; Top Overlay "B12" at 4133.6,1885 h70
U1_1: Top Overlay "5V" at 4513.2,8367.78 h70; Top Overlay "B9" at 4513.2,8272.78 h70; Top Overlay "B8" at 4518.2,8172.78 h70; Top Overlay "3.3V" at 4498.2,8572.78 h70; Top Overlay "GND" at 4476,8473.78 h70; Top Overlay "A5" at 4123.2,7662.78 h70; Top Overlay "A2" at 4123.2,7964 h70; Top Overlay "A3" at 4123.2,7863.78 h70; Top Overlay "A4" at 4123.2,7762 h70; Top Overlay "RST" at 4123.2,6962.78 h70; Top Overlay "B10" at 4123.2,7164.78 h70; Top Overlay "B11" at 4123.2,7063 h70; Top Overlay "A6" at 4123.2,7564.78 h70; Top Overlay "A7" at 4123.2,7463 h70; Top Overlay "B0" at 4123.2,7362.78 h70; Top Overlay "B1" at 4123.2,7262 h70; Top Overlay "3.3V" at 4123.2,6865.78 h70; Top Overlay "B15" at 4503.6,6966.78 h70; Top Overlay "A8" at 4515.7,7067.78 h70; Top Overlay "A11" at 4512.4,7366 h70; Top Overlay "B3" at 4518.2,7666.78 h70; Top Overlay "A9" at 4516.9,7168.78 h70; Top Overlay "A15" at 4501.1,7568.78 h70; Top Overlay "A12" at 4501.1,7467 h70; Top Overlay "A10" at 4501.1,7266.78 h70; Top Overlay "VBAT" at 4126.06,8568 h70; Top Overlay "B5" at 4518.2,7867.78 h70; Top Overlay "B14" at 4502.4,6869 h70; Top Overlay "B7" at 4518.2,8066 h70; Top Overlay "B4" at 4516.9,7766 h70; Top Overlay "B6" at 4519.4,7968.78 h70; Top Overlay "C15" at 4123.2,8269.78 h70; Top Overlay "C13" at 4123.2,8468.78 h70; Top Overlay "C14" at 4123.2,8370.78 h70; Top Overlay "A0" at 4123.2,8168.78 h70; Top Overlay "A1" at 4126,8068 h70; Top Overlay "GND" at 4123.2,6767.78 h70; Top Overlay "B13" at 4503.2,6767.78 h70; Top Overlay "GND" at 4123.2,6666.78 h70; Top Overlay "B12" at 4503.6,6669 h70